# Altium PCB ControleSTM.PcbDoc (part 3 of 3)
Units mm, origin at the board's own origin, x right, y up, seen from the top; angles counter-clockwise.
Board outline 69.32 x 31.88 mm, 2 copper layers (Top Layer, Bottom Layer); 62 components, 48 nets, 242 pads, 79 vias.
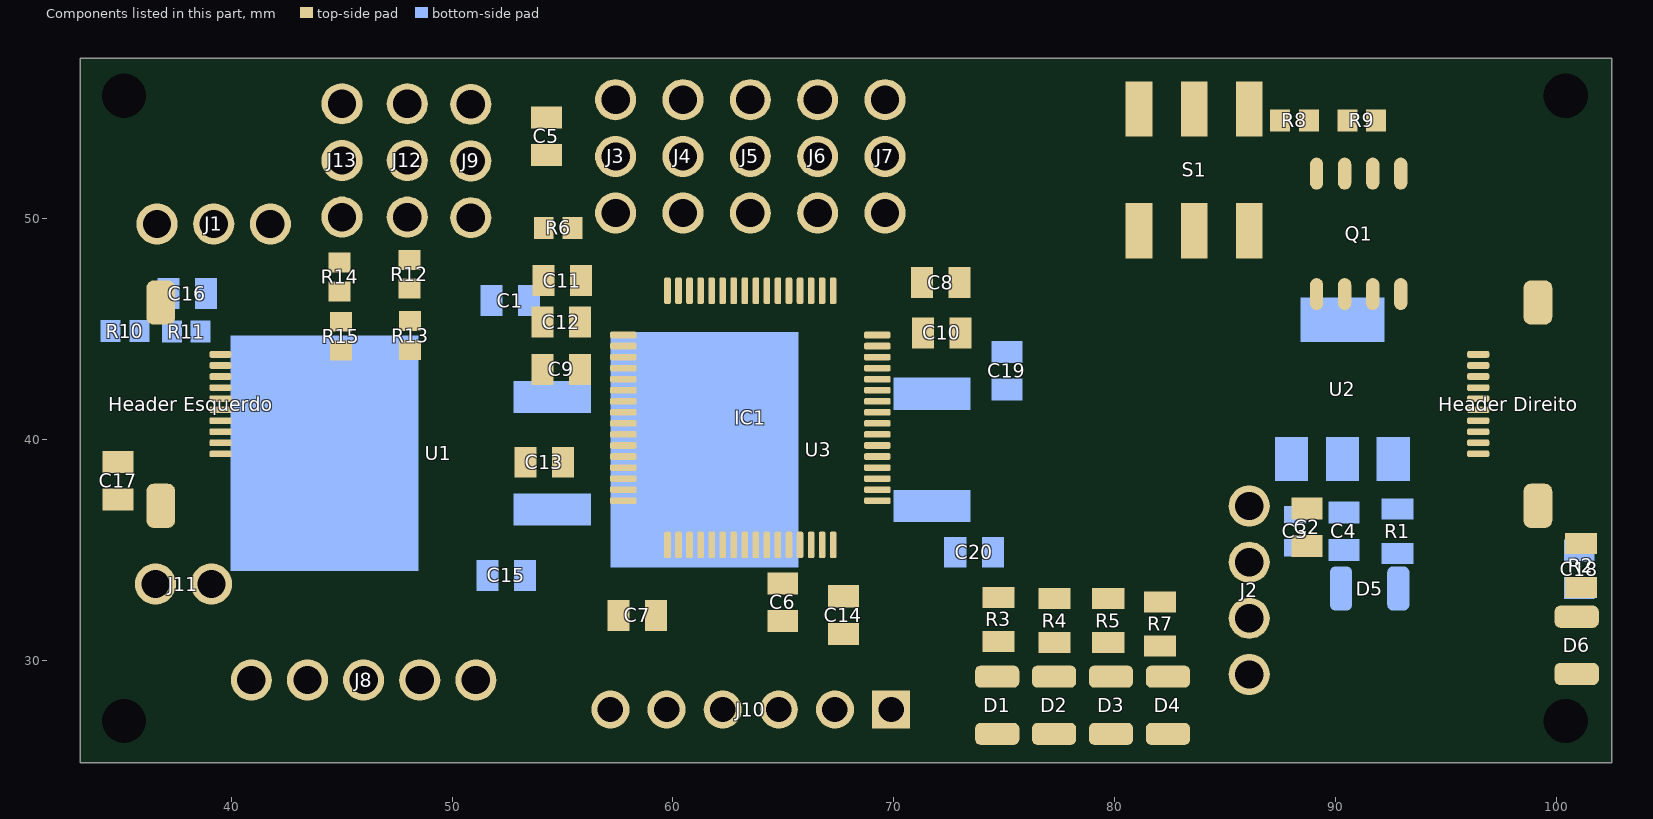
[diagram p2: the components of this part, seen from the top]

## Polygon pours and split planes (outlines as drawn) (continued)
VSS on Bottom Layer "VSS_L02_P294" (solid, pour order 294): 99.525,29.125 ccw(c99.925,29.125) 99.925,28.725 101.425,28.725 ccw(c101.425,29.35) 102.05,29.35 102.05,33.65 ccw(c101.6,33.65) 101.6,34.1 99.95,34.1 ccw(c99.95,33.675) 99.525,33.675
5V on Bottom Layer "5V_L02_P293" (solid, pour order 293): 99.85,36.025 99.85,34.725 ccw(c100.225,34.725) 100.225,34.35 101.525,34.35 ccw(c101.525,34.875) 102.05,34.875 102.05,41 ccw(c101.65,41) 101.65,41.4 100.25,41.4 ccw(c100.25,41) 99.85,41
BAT on Bottom Layer "BAT_L02_P268" (solid, pour order 268): 36.297,38.024 cw(c35.128,38.024) 35.128,36.855 34.112,36.855 ccw(c34.112,36.22) 33.477,36.22 33.477,29.616 ccw(c34.214,29.616) 34.214,28.88 35.458,28.88 cw(c35.458,27.991) 36.347,27.991 36.525,27.991 ccw(c36.525,28.55) 37.084,28.55 37.084,38.43 ccw(c36.83,38.43) 36.83,38.684
MedidorBateria on Bottom Layer "MEDIDORBATERIA_L02_P249" (solid, pour order 249): 35.375,45.431 35.375,47.059 cw(c35.827,47.072) 35.814,47.523 36.785,47.523 36.785,45.685 cw(c36.625,45.685) 36.625,45.525
MedidorBateria on Bottom Layer "MEDIDORBATERIA_L02_P245" (solid, pour order 245): 35.475,45.525 35.797,45.525 ccw(c35.797,46.33) 36.601,46.33 36.601,47.295 cw(c36.83,47.295) 36.83,47.523 37.668,47.523 cw(c37.668,47.346) 37.846,47.346 37.846,45.337 ccw(c37.875,45.337) 37.875,45.308 37.205,45.308 ccw(c37.205,45.085) 36.982,45.085
BAT on Bottom Layer "BAT_L02_P244" (solid, pour order 244): 95.174,43.231 96.012,43.231 cw(c96.012,41.275) 97.968,41.275 cw(c98.069,41.275) 98.069,41.377 98.933,41.377 cw(c100.787,41.377) 100.787,43.231 101.422,43.231 ccw(c99.593,43.231) 99.593,45.06 97.282,45.06
VDD on Bottom Layer "VDD_L02_P236" (solid, pour order 236): 92.735,36.119 93.396,36.119 cw(c93.396,35.433) 94.082,35.433 94.082,32.08 cw(c93.624,32.08) 93.624,31.623 92.227,31.623 ccw(c92.227,31.191) 91.796,31.191 91.796,28.143 ccw(c92.558,28.143) 92.558,27.381 95.504,27.381 ccw(c95.504,29.083) 97.206,29.083 97.206,35.052 ccw(c94.666,35.052) 94.666,37.592 93.466,37.592
BAT on Bottom Layer "BAT_L02_P235" (solid, pour order 235): 35.331,40.107 cw(c35.331,39.116) 36.322,39.116 36.322,38.964 ccw(c36.322,39.268) 36.627,39.268 36.627,40.818
BAT on Bottom Layer "BAT_L02_P233" (solid, pour order 233): 35.637,44.1 36.824,44.1 cw(c36.774,43.586) 37.287,43.536 37.287,41.148 cw(c36.297,41.097) 36.347,40.107 35.331,40.107 cw(c35.331,40.792) 34.646,40.792 34.646,43.332 cw(c35.001,43.332) 35.001,43.688
MedidorBateria on Bottom Layer "MEDIDORBATERIA_L02_P232" (solid, pour order 232): 35.375,45.425 cw(c35.475,45.425) 35.475,45.525 37.775,45.525 cw(c37.775,45.425) 37.875,45.425 37.875,44.4 cw(c37.775,44.4) 37.775,44.3 35.5,44.3 cw(c35.5,44.425) 35.375,44.425
BAT on Bottom Layer "BAT_L02_P231" (solid, pour order 231): 35.637,44.1 35.325,44.1 cw(c35.325,44.35) 35.075,44.35 35.075,45.325 ccw(c34.9,45.325) 34.9,45.5 34.025,45.5 ccw(c34.025,45.375) 33.9,45.375 33.9,44.025 ccw(c34.1,44.025) 34.1,43.825 34.375,43.825 cw(c34.375,43.575) 34.625,43.575 34.625,43.4 ccw(c34.85,43.4) 34.85,43.175 35.425,43.175 ccw(c35.425,43.7) 35.95,43.7
BAT on Bottom Layer "BAT_L02_P223" (solid, pour order 223): 36.09,41.6 ccw(c36.09,41.135) 35.625,41.135 35.625,40.85 cw(c35.625,41.375) 35.1,41.375 35.1,41.575 cw(c35.375,41.575) 35.375,41.85 35.825,41.85
BAT on Bottom Layer "BAT_L02_P221" (solid, pour order 221): 35.1,41.575 35.05,41.575 cw(c35.05,42) 34.625,42 34.625,43.575 cw(c35.15,43.575) 35.15,44.1 36.125,44.1 cw(c36.125,43.775) 36.45,43.775 36.45,42.05 cw(c36,42.05) 36,41.6
BAT on Bottom Layer "BAT_L02_P219" (solid, pour order 219): 94.945,43.231 cw(c94.945,44.018) 94.158,44.018 94.158,45.872 cw(c94.818,45.872) 94.818,46.533 101.549,46.533 cw(c101.549,45.949) 102.133,45.949 102.133,43.942 cw(c101.422,43.942) 101.422,43.231
VSS on Bottom Layer "VSS_L02_P200" (solid, pour order 200): 93.193,40.462 92.126,40.462 ccw(c92.126,40.056) 91.719,40.056 91.719,38.379 ccw(c92.024,38.379) 92.024,38.075 96.495,38.075 ccw(c96.495,38.913) 97.333,38.913 97.333,39.929 ccw(c96.799,39.929) 96.799,40.462
5V on Bottom Layer "5V_L02_P174" (solid, pour order 174): 88.773,36.093 cw(c88.519,36.093) 88.519,35.839 85.09,35.839 cw(c85.09,36.297) 84.633,36.297 84.633,39.7 cw(c85.369,39.7) 85.369,40.437 88.214,40.437 cw(c88.214,39.878) 88.773,39.878

## Keep-outs
Keep-Out Layer:
  lines w0.254: 33.172,25.4 33.172,57.277 ; 33.172,25.4 102.489,25.4 ; 33.172,25.4 33.172,57.277 ; 33.172,25.4 102.489,25.4 ; 33.172,57.277 102.489,57.277 ; 33.172,57.277 102.489,57.277 ; 102.489,25.4 102.489,57.277 ; 102.489,25.4 102.489,57.277

## Silkscreen, mask and mechanical layers (free items; w line width, h text height)
Bottom Overlay:
  region: 523 vertices and 39 holes, not listed, extent 75.429,51.502 98.579,53.31
  text "Kaminari - MK1" at 98.142,48.742 h3.5
  text "A" at 84.4,25.075 h10
BoardOutLine:
  the board outline again, w0.254

## Text inside footprints (layer, text, board x,y; h text height)
J2: Top Overlay "GND" at 83.871,35.138 h1; Top Overlay "TX" at 84.125,32.583 h1; Top Overlay "RX" at 84.226,29.942 h1; Top Overlay "5V" at 84.15,37.282 h1
J8: Top Overlay "DIO" at 50.444,30.515 h1; Top Overlay "GND" at 40.157,30.515 h1; Top Overlay "3.3V" at 42.697,30.523 h1; Top Overlay "RESET" at 44.856,30.515 h1; Top Overlay "CLK" at 48.158,30.515 h1